# EAGLE board TTR1 Gr4 - SIMON Timothée Testeur Simple (EAGLE 7.6.0)
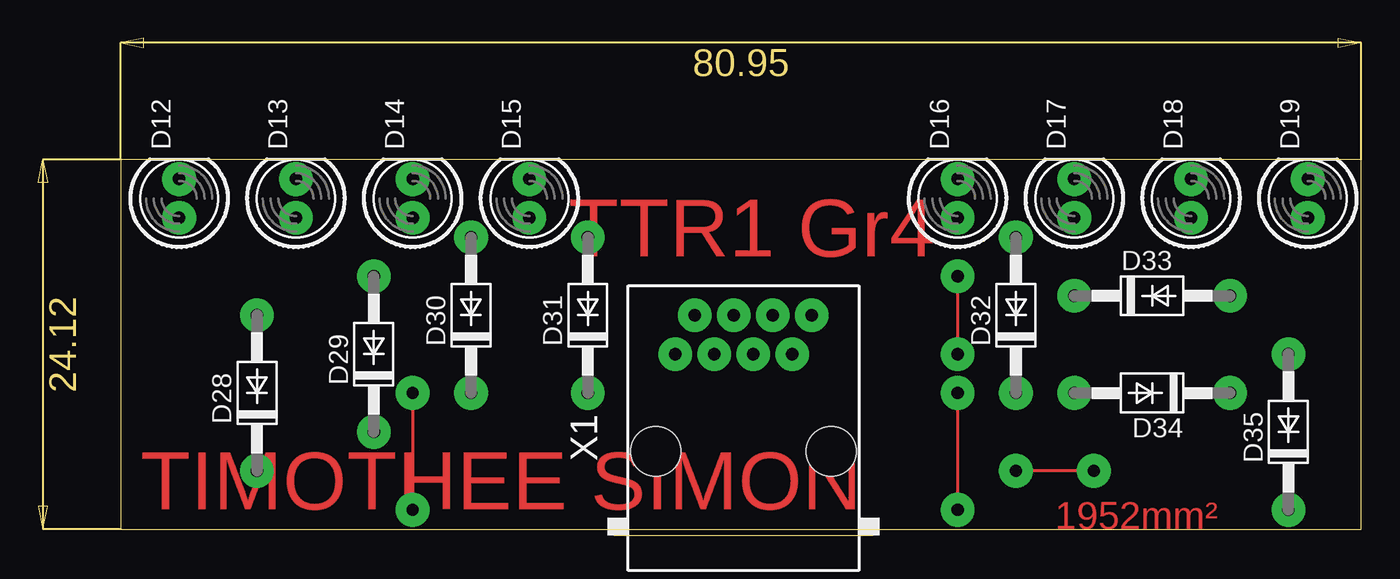
[diagram p0: board, top side]
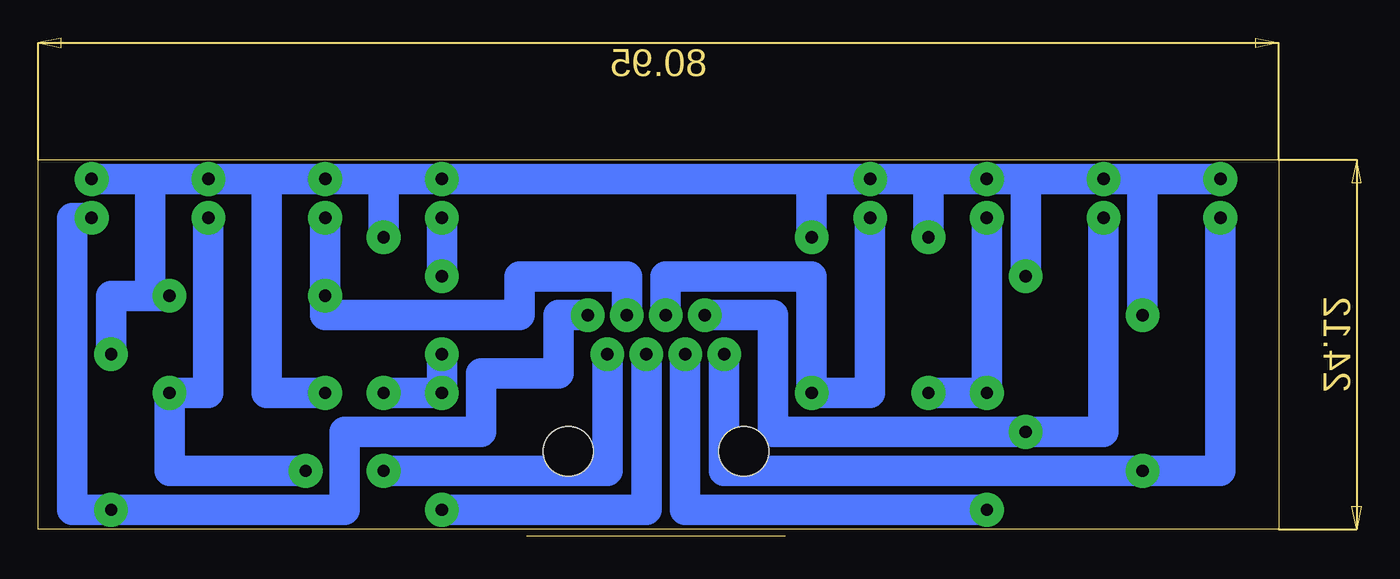
[diagram p1: board, bottom side, seen from below]

Size 80.95 x 24.12 mm. Coordinates in mm from the lower left corner, seen from the top.
Outline: 0,0 80.95,0 80.95,24.12 0,24.12 0,0
Copper layers (1*16): Top 0.035mm / dielectric 1.5mm / Bottom 0.035mm
Design rules "default": minimum track width 10mil, minimum drill 24mil, track to track 8mil, track to pad 8mil, pad to pad 8mil, via to via 8mil, smd to smd 8mil, copper to edge 40mil, drill to drill 8mil, minimum pad ring 10mil, minimum via ring 8mil, stop-mask expansion 4mil, vias tented up to drill 0mil, thermal gap 10mil
Net classes: 0 default: width 2 mm, drill 0.8 mm, clearance 0.2 mm

## Footprints (pad centres in the part's own frame; a part is rotated, then mirrored left to right if it is on the bottom)
LED5MM = drill 0.813 pad 2.2: A -1.27,0; K 1.27,0
DO41-10 = drill 0.8 pad 2.2: A 5.08,0; C -5.08,0
RJ45-NO-SHIELD = drill 0.8 pad 2.2: 1 -4.445,6.35; 2 -3.175,8.89; 3 -1.905,6.35; 4 -0.635,8.89; 5 0.635,6.35; 6 1.905,8.89; 7 3.175,6.35; 8 4.445,8.89 | hole 3.251: -5.715,0; 5.715,0

## Placement (x,y rotation side)
D12  [LED5MM]  3.81,21.59 90 top
D13  [LED5MM]  11.43,21.59 90 top
D14  [LED5MM]  19.05,21.59 90 top
D15  [LED5MM]  26.67,21.59 90 top
D16  [LED5MM]  54.61,21.59 90 top
D17  [LED5MM]  62.23,21.59 90 top
D18  [LED5MM]  69.85,21.59 90 top
D19  [LED5MM]  77.47,21.59 90 top
D28  1N4004  [DO41-10]  8.89,8.89 90 top
D29  1N4004  [DO41-10]  16.51,11.43 90 top
D30  1N4004  [DO41-10]  22.86,13.97 90 top
D31  1N4004  [DO41-10]  30.48,13.97 90 top
D32  1N4004  [DO41-10]  58.42,13.97 90 top
D33  1N4004  [DO41-10]  67.31,15.24 0 top
D34  1N4004  [DO41-10]  67.31,8.89 180 top
D35  1N4004  [DO41-10]  76.2,6.35 90 top
X1  RJ45-6L-B  [RJ45-NO-SHIELD]  40.64,5.08 0 top

## Library data of the parts
D12-D19 = led
D28-D35 = diode
X1 = con-tycoelectronics; MPN: RJ45-6L-B; OC_FARNELL: unknown; OC_NEWARK: 16R6090

## Nets
N$1: D12.K D13.K D14.K D15.K D16.K D17.K D18.K D19.K D28.A D29.A D30.A D31.A D32.A D33.A D34.A D35.A
N$2: D12.A D28.C X1.1
N$3: D13.A D29.C X1.2
N$5: D14.A D30.C X1.3
N$6: D15.A D31.C X1.4
N$7: D16.A D32.C X1.5
N$8: D17.A D33.C X1.6
N$9: D18.A D34.C X1.7
N$10: D19.A D35.C X1.8

## Tracks (layer width: path | path; a pad name or v marks a point on that pad's centre or on a via)
N$1
  Bottom 2: D12.K 8.89,22.86 | 8.89,22.86 D13.K 16.51,22.86 | 8.89,22.86 D28.A | 16.51,22.86 D14.K 22.86,22.86 | 16.51,22.86 D29.A | 22.86,22.86 D15.K 30.48,22.86 | D30.A 22.86,22.86 | D31.A 30.48,22.86 | 30.48,22.86 D16.K 58.42,22.86 | 58.42,22.86 D17.K 66.04,22.86 | D32.A 58.42,22.86 | 66.04,22.86 D18.K | D34.A 66.04,8.89 66.04,22.86 | D18.K D19.K | D35.A 76.2,15.24 73.66,15.24 | 73.66,15.24 D33.A | D18.K 73.66,22.86 73.66,15.24
N$2
  Bottom 2: D12.A 3.81,3.81 D28.C 36.19,3.81 X1.1
N$3
  Bottom 2: D13.A 11.43,6.35 D29.C 33.02,6.35 33.02,13.97 X1.2
N$4  (via drill 0.8 pad 2.2)
  other vias: 19.05,1.27
N$5  (via drill 0.8 pad 2.2)
  Top 0.2: v19.05,8.89 19.05,1.27
  Bottom 2: D14.A v19.05,8.89 D30.C | X1.3 38.73,1.27 19.05,1.27
N$6
  Bottom 2: X1.4 40,16.51 30.48,16.51 D31.C 26.67,8.89 D15.A
N$7  (via drill 0.8 pad 2.2)
  Top 0.2: v54.61,16.51 v54.61,11.43 | v54.61,8.89 v54.61,1.27
  Bottom 2: v54.61,16.51 D16.A | D32.C v54.61,8.89 v54.61,11.43 | v54.61,1.27 41.27,1.27 X1.5
N$8
  Bottom 2: X1.6 42.55,16.51 49.53,16.51 49.53,13.97 62.23,13.97 D33.C D17.A
N$9  (via drill 0.8 pad 2.2)
  Top 0.2: v63.5,3.81 v58.42,3.81
  Bottom 2: v58.42,3.81 43.81,3.81 X1.7 | D18.A 69.85,8.89 D34.C 72.39,3.81 v63.5,3.81
N$10
  Bottom 2: X1.8 46.99,13.97 46.99,10.16 52.07,10.16 52.07,6.35 60.96,6.35 60.96,1.27 D35.C 78.74,1.27 78.74,20.32 D19.A

## Text on the board
Top: TTR1 Gr4 | TIMOTHEE SIMON | 1952mm²